# Altium PCB DXv2.pcbdoc (part 3 of 3)
Units mil, origin at the board's own origin, x right, y up, seen from the top; angles counter-clockwise.
Board outline 12846.15 x 9153.85 mil, 2 copper layers (TopLayer, BottomLayer); 114 components, 102 nets, 394 pads, 175 vias.
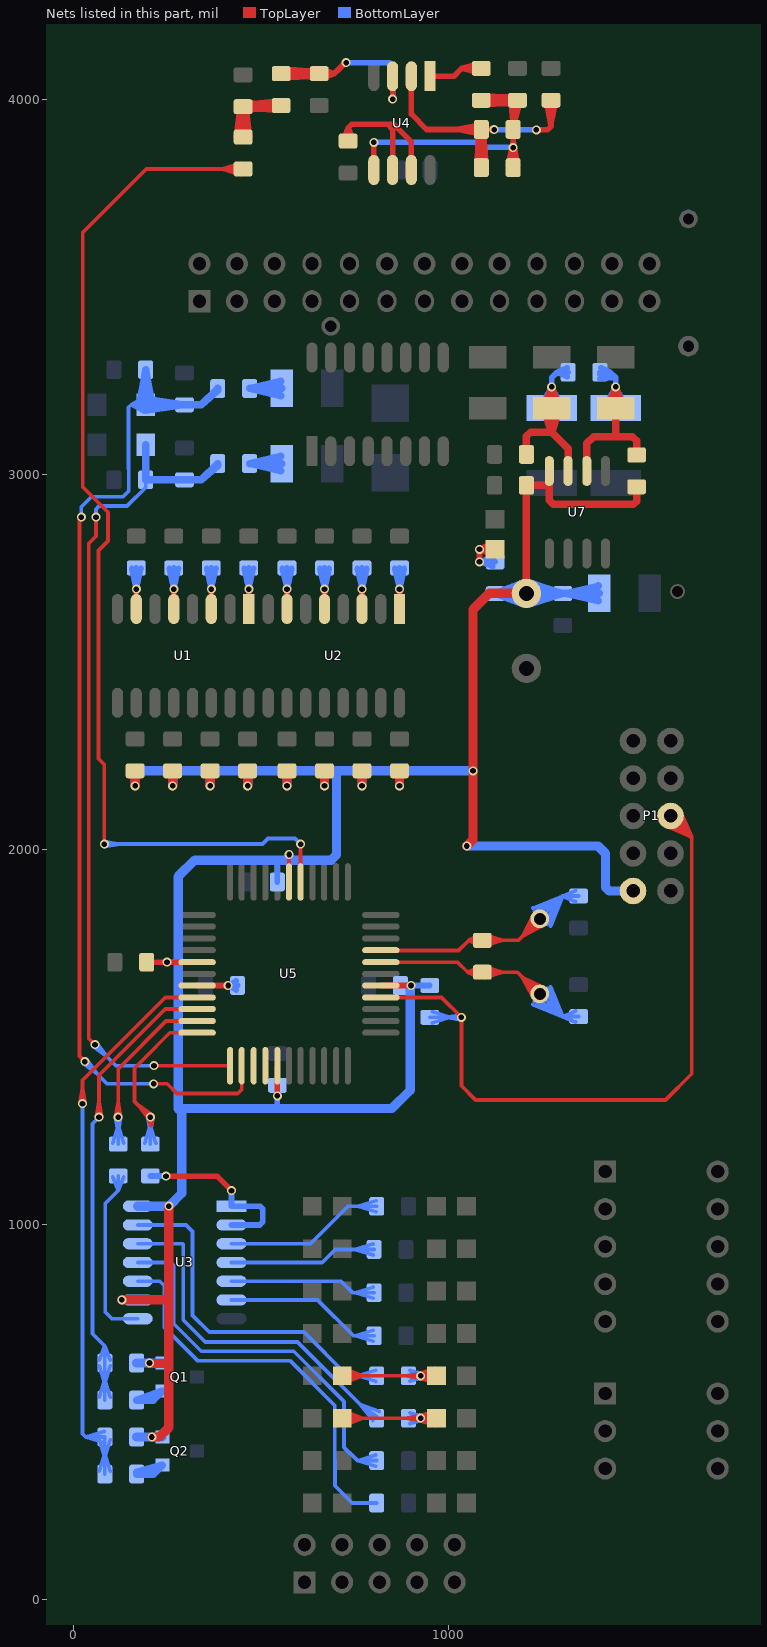
[diagram p3: the nets of this part, all layers, seen from the top]

## Via types
v1: diameter 24, hole 15, TopLayer to BottomLayer, tented both sides, 115 vias
v2: diameter 40, hole 25, TopLayer to BottomLayer, tented both sides, 60 vias

## Nets (pads, with @x,y where several pads share a name; then routed paths per layer and width w, separated by ;. In a path a pad name is that pad's centre, name@x,y a point inside that pad or via, vN(x,y) a via of type N, cw(c..) or ccw(c..) an arc to the next point about the centre after c; other vN are vias at no path point) (continued)
LED-007: D9.2 D17.2 R40.2 | length 1818
  TopLayer w10: D9.2@717.94,484.24 D17.2@969.2,484.24 ; D9.2@718.84,474.28 772.94,484.24 ; D9.2@718.84,494.2 772.94,484.24 ; D9.2@721.57,464.57 772.94,484.24 ; D9.2@721.57,503.91 772.94,484.24 ; v1@924.37,477.77 D17.2@965.56,464.57 ; v1@924.37,490.71 D17.2@965.56,503.91 ; v1@925.96,477.32 D17.2@968.29,474.28 ; v1@925.96,491.16 D17.2@968.29,494.2 ; v1@926.46,477.27 885.04,484.24 v1@926.46,491.22 ; v1@927.62,477.27 969.04,484.24 v1@927.62,491.22 ; v1@929.24,477.59 D17.2@968.29,494.2 ; v1@929.24,490.89 D17.2@968.29,474.28 ; v1@930.72,478.28 D17.2@965.56,503.91 ; v1@930.72,490.2 D17.2@965.56,464.57 ; 914.2,484.24 D17.2@965.56,464.57 ; 914.2,484.24 D17.2@965.56,503.91 ; 914.2,484.24 D17.2@968.29,474.28 ; 914.2,484.24 D17.2@968.29,494.2 ; 914.2,484.24 v1@925.13,477.51 ; 914.2,484.24 v1@925.13,490.98 ; 914.2,484.24 v1(927.04,484.24) ; 914.2,484.24 v1@925.13,477.51 ; 914.2,484.24 v1@925.13,490.98 ; 914.2,484.24 v1(927.04,484.24) ; 914.2,484.24 v1@925.13,477.51 ; 914.2,484.24 v1@925.13,490.98 ; 914.2,484.24 v1(927.04,484.24) ; 914.2,484.24 v1@925.13,477.51 ; 914.2,484.24 v1@925.13,490.98 ; 914.2,484.24 v1(927.04,484.24) ; v1(927.04,484.24) D17.2@965.56,503.91 ; v1(927.04,484.24) D17.2@968.29,494.2 ; v1(927.04,484.24) D17.2@965.56,464.57 ; v1(927.04,484.24) D17.2@968.29,474.28
  BottomLayer w10: v1@923.22,478.38 R40.2@898.24,498.83 ; v1@923.22,490.11 R40.2@898.24,469.65 ; v1@926.28,477.28 R40.2@894.76,484.24 ; v1@926.28,491.2 R40.2@894.76,484.24 ; v1@929.51,477.69 R40.2@898.24,469.65 ; v1@929.51,490.79 R40.2@898.24,498.83 ; R40.2@894.76,484.24 v1(927.04,484.24) ; R40.2@898.24,469.65 v1(927.04,484.24) ; R40.2@898.24,498.83 v1(927.04,484.24)
LED-008: D10.2 D18.2 R41.2 | length 1818
  TopLayer w10: D10.2@717.94,597.27 D18.2@969.2,597.27 ; D10.2@718.84,587.31 772.94,597.27 ; D10.2@718.84,607.23 772.94,597.27 ; D10.2@721.57,577.6 772.94,597.27 ; D10.2@721.57,616.93 772.94,597.27 ; v1@924.37,590.8 D18.2@965.56,577.6 ; v1@924.37,603.74 D18.2@965.56,616.93 ; v1@925.96,590.35 D18.2@968.29,587.31 ; v1@925.96,604.18 D18.2@968.29,607.23 ; v1@926.46,590.29 885.04,597.27 v1@926.46,604.24 ; v1@927.62,590.29 969.04,597.27 v1@927.62,604.24 ; v1@929.24,590.62 D18.2@968.29,607.23 ; v1@929.24,603.91 D18.2@968.29,587.31 ; v1@930.72,591.31 D18.2@965.56,616.93 ; v1@930.72,603.22 D18.2@965.56,577.6 ; 914.2,597.27 D18.2@965.56,577.6 ; 914.2,597.27 D18.2@965.56,616.93 ; 914.2,597.27 D18.2@968.29,587.31 ; 914.2,597.27 D18.2@968.29,607.23 ; 914.2,597.27 v1@925.13,590.53 ; 914.2,597.27 v1@925.13,604 ; 914.2,597.27 v1(927.04,597.27) ; 914.2,597.27 v1@925.13,590.53 ; 914.2,597.27 v1@925.13,604 ; 914.2,597.27 v1(927.04,597.27) ; 914.2,597.27 v1@925.13,590.53 ; 914.2,597.27 v1@925.13,604 ; 914.2,597.27 v1(927.04,597.27) ; 914.2,597.27 v1@925.13,590.53 ; 914.2,597.27 v1@925.13,604 ; 914.2,597.27 v1(927.04,597.27) ; v1(927.04,597.27) D18.2@965.56,577.6 ; v1(927.04,597.27) D18.2@965.56,616.93 ; v1(927.04,597.27) D18.2@968.29,587.31 ; v1(927.04,597.27) D18.2@968.29,607.23
  BottomLayer w10: v1@923.22,591.4 R41.2@898.24,611.86 ; v1@923.22,603.13 R41.2@898.24,582.68 ; v1@926.28,590.31 R41.2@894.76,597.27 ; v1@926.28,604.23 R41.2@894.76,597.27 ; v1@929.51,590.72 R41.2@898.24,582.68 ; v1@929.51,603.82 R41.2@898.24,611.86 ; R41.2@894.76,597.27 v1(927.04,597.27) ; R41.2@898.24,582.68 v1(927.04,597.27) ; R41.2@898.24,611.86 v1(927.04,597.27)
LED-164-1: R27.2 U5.33 | length 795.8
  TopLayer w10: 189,1442.63 163.99,1417.62 163.99,1329.03 v1(206.21,1286.82) 207.94,1263.87 ; 189,1443 258.18,1512.18 U5.33@330.85,1512.18 ; v1@199.39,1285.23 207.94,1263.87 ; v1@200.9,1282.25 172.99,1320.03 v1@210.78,1292.12 ; v1@207.94,1286.82 207.94,1263.87 ; v1@213.19,1286.27 207.94,1263.87
  BottomLayer w10: R27.2@191.38,1217.29 206.21,1265.04 R27.2@221.04,1217.29 ; v1@199.23,1286.23 206.21,1244.82 v1@213.18,1286.23 ; R27.2@206.21,1215.04 v1(206.21,1286.82)
LED-164-2: R28.2 U5.32 | length 772.1
  TopLayer w10: v1@113.53,1287.4 120.5,1328.82 ; v1(120.5,1286.82) 120.5,1328.82 ; v1@120.5,1288.55 120.5,1415.81 247.88,1543.18 U5.32@330.85,1543.18 ; v1@127.48,1287.4 120.5,1328.82
  BottomLayer w10: R28.2@105.67,1217.29 120.5,1265.04 R28.2@135.33,1217.29 ; v1@113.53,1286.23 120.5,1244.82 v1@127.48,1286.23 ; R28.2@120.5,1215.04 v1(120.5,1286.82)
LED-COM01: R33.2 R42.2 U5.31 | length 1725.6
  TopLayer w10: v1@62.45,1287.4 69.43,1328.82 v1@76.4,1287.4 ; v1(69.43,1286.82) 69.43,1398.57 246.04,1575.18 U5.31@330.85,1575.18
  BottomLayer w10: v1(69.43,1286.82) 52.11,1269.5 52.11,709.39 84.85,676.65 ; R42.2@70.02,540.03 84.85,587.78 ; R33.2@70.02,624.22 84.85,576.47 ; R33.2@70.11,639.28 84.85,676.65 ; R42.2@84.85,532.78 R33.2@84.85,631.47 84.85,676.65 ; R42.2@84.85,537.78 84.85,587.78 ; R33.2@84.85,626.47 84.85,576.47 ; R33.2@84.85,636.47 84.85,676.65 ; R33.2@99.59,639.28 84.85,676.65 ; R42.2@99.68,540.03 84.85,587.78 ; R33.2@99.68,624.22 84.85,576.47
LED-COM02: R45.2 R46.2 U5.30 | length 1985.4
  TopLayer w10: v1@18.3,1323.76 25.28,1365.17 v1@32.25,1323.76 ; v1(25.28,1323.17) 25.28,1385.28 246.18,1606.18 U5.30@330.85,1606.18
  BottomLayer w10: v1(25.28,1323.17) 25.28,442.75 33.93,434.09 R45.2@84.85,434.09 R46.2@84.85,335.4 ; R46.2@70.02,342.65 84.85,390.4 ; R45.2@70.02,426.84 84.85,379.09 ; R45.2@82.6,419.26 34.85,434.09 R45.2@82.6,448.92 ; R46.2@84.85,340.4 84.85,390.4 ; R45.2@84.85,429.09 84.85,379.09 ; R46.2@99.68,342.65 84.85,390.4 ; R45.2@99.68,426.84 84.85,379.09
MCU-PWM: R26.1 U5.16 | length 3044.3
  TopLayer w10: v1(83.59,2015.12) 83.59,2226.68 67.72,2242.55 67.72,2798.13 93.19,2823.6 93.19,2900.33 25.93,2967.6 25.93,3646.29 195.13,3815.5 R26.1@453.5,3815.5 ; R26.1@446.25,3800.67 398.5,3815.5 ; R26.1@446.25,3830.33 398.5,3815.5 ; R26.1@448.5,3815.5 398.5,3815.5 ; U5.16@606.85,1914.18 v1(606.85,2015.12)
  BottomLayer w10: v1(83.59,2015.12) 505.12,2015.12 520,2030 591.97,2030 v1(606.85,2015.12) ; v1@84.17,2008.15 125.59,2015.12 v1@84.17,2022.1
MCU_AI01: C16.1 D20.K R48.2 R50.2 U5.34 | length 2784.6
  TopLayer w10: v1(58.61,1480.3) 42.08,1496.83 42.08,2816.87 61.19,2835.99 v1(61.19,2887.07) ; v1(215.81,1424.18) U5.34@418.85,1424.18
  BottomLayer w10: v1@54.03,1475 91.78,1447.06 ; v1@61.19,2888.36 61.19,2908.27 69.49,2916.57 143.86,2916.57 193.73,2966.44 C16.1@193.73,2986.57 ; v1@63.92,1484.86 91.78,1447.06 ; v1(215.81,1424.18) 114.66,1424.18 58.61,1480.23 v1(58.61,1480.3) 91.78,1447.06
  BottomLayer w20: C16.1@193.73,2991.57 D20.K@193.73,3071.57 ; D20.K@193.73,3080.07 C16.1@193.73,2986.57 ; C16.1@212.24,2986.57 R50.2@292.24,2986.57 ; R50.2@273.73,2986.57 C16.1@193.73,2986.57 ; R50.2@302.24,2986.57 342.49,2986.57 ; R48.2@385.92,3025 342.49,2986.57 ; R48.2@385.92,3030 342.49,2986.57 ; C16.1@193.73,2986.57 R50.2@297.24,2986.57 342.49,2986.57
MCU_AI02: C17.1 D21.K R49.2 R51.2 U5.35 | length 4062.4
  TopLayer w10: v1(22.19,2887.07) 17.08,2881.96 17.08,1449.76 v1(31.66,1435.18) ; v1(215.22,1375.98) 251.23,1375.98 277.2,1350.01 439.08,1350.01 449.85,1360.78 U5.35@449.85,1424.18
  BottomLayer w10: v1(22.19,2887.07) 22.19,2914.31 49.45,2941.57 133.5,2941.57 148.73,2956.8 148.73,3016.34 148.21,3016.86 148.21,3179.81 155.07,3186.67 ; v1@27.09,1429.87 64.87,1401.96 v1@36.97,1439.74 ; v1(31.66,1435.18) 90.85,1375.98 v1(215.22,1375.98) ; D21.K@188.56,3167.35 155.07,3186.67 ; D21.K@188.56,3205.99 155.07,3186.67 ; D21.K@192.44,3176.76 155.07,3186.67 ; D21.K@192.44,3196.59 155.07,3186.67 ; D21.K@193.73,3186.67 155.07,3186.67
  BottomLayer w20: D21.K@178.79,3193 C17.1@193.73,3276.67 ; D21.K@179.33,3196.03 C17.1@193.73,3275.18 ; D21.K@193.73,3191.67 C17.1@193.73,3276.67 ; C17.1@193.73,3280.18 D21.K@193.73,3186.67 342.49,3186.67 ; D21.K@195.06,3171.73 278.73,3186.67 D21.K@195.06,3201.62 ; D21.K@208.13,3196.03 C17.1@193.73,3275.18 ; D21.K@208.67,3193 C17.1@193.73,3276.67 ; D21.K@212.24,3186.67 R51.2@292.24,3186.67 ; D21.K@212.33,3174.82 R51.2@292.24,3186.67 ; D21.K@212.33,3198.53 R51.2@292.24,3186.67 ; R51.2@302.24,3186.67 342.49,3186.67 ; R49.2@385.93,3225.11 342.49,3186.67 ; R49.2@385.93,3230.11 342.49,3186.67 ; C17.1@193.73,3275.18 193.73,3195.18 C17.1@193.73,3275.18
MCU_AI03: U5.37
MCU_AI04: U5.36
NetC3_1: C3.1 R26.2 R29.1 | length 2056.1
  TopLayer w15: R26.2@436,3900.82 C3.1@443.92,3965.65 ; R26.2@441.06,3901.7 453.5,3965.5 R26.2@465.94,3901.7 ; C3.1@441.06,3980.3 453.5,3916.5 C3.1@465.94,3980.3 ; R26.2@446.17,3902.57 C3.1@463.08,3965.65 ; R26.2@448.5,3900.5 C3.1@443.92,3965.65 ; R26.2@453.5,3900.5 C3.1@453.5,3981.5 ; C3.1@453.5,3984.65 R29.1@555,3984.65 ; R26.2@458.5,3900.5 C3.1@463.08,3965.65 ; C3.1@458.5,3981.5 523.61,3984.65 ; C3.1@459.1,3993.99 523.61,3984.65 ; C3.1@460.3,3969.13 523.61,3984.65 ; R26.2@460.83,3902.57 C3.1@443.92,3965.65 ; R26.2@471,3900.82 C3.1@463.08,3965.65 ; R29.1@547.75,3972.35 484.45,3990.32 ; R29.1@548.44,3997.05 484.93,3982.78 ; R29.1@548.8,3972.21 485,3984.65 ; R29.1@548.8,3997.09 485,3984.65 ; R29.1@549.16,3972.18 484.93,3982.78 ; R29.1@549.89,3997.15 484.45,3990.32 ; R29.1@550.66,3972.17 483.72,3974.87 ; 483.72,3974.87 R29.1@547.03,3996.79 ; 483.72,3974.87 R29.1@550,3984.65 ; 484.45,3990.32 R29.1@550,3984.65 ; 484.93,3982.78 R29.1@550,3984.65 ; 485,3984.65 R29.1@550,3984.65 ; 523.61,3984.65 R29.1@547.04,3972.51 ; 523.61,3984.65 R29.1@547.04,3996.79 ; 523.61,3984.65 R29.1@550,3984.65 ; 523.61,3984.65 R29.1@547.04,3972.51 ; 523.61,3984.65 R29.1@547.04,3996.79 ; 523.61,3984.65 R29.1@550,3984.65 ; 523.61,3984.65 R29.1@547.04,3972.51 ; 523.61,3984.65 R29.1@547.04,3996.79 ; 523.61,3984.65 R29.1@550,3984.65
NetC6_1: C6.1 R29.2 U4.3 | length 2043.5
  TopLayer w15: R29.2@555,4066.65 681.75,4066.65 ; R29.2@559.54,4057.16 624.73,4061.01 ; R29.2@559.78,4082.15 629.48,4077.11 ; R29.2@560.62,4057.17 625.12,4066.65 ; R29.2@560.85,4057.18 C6.1@651.5,4069.65 ; R29.2@560.85,4082.12 C6.1@651.5,4069.65 ; R29.2@561.77,4082.02 625.12,4066.65 ; R29.2@562.44,4057.39 629.48,4077.11 ; R29.2@562.83,4081.82 624.73,4061.01 ; C6.1@649.73,4082.02 586.4,4066.65 ; C6.1@650.88,4057.17 586.4,4066.65 ; C6.1@656.5,4069.65 696.44,4069.65 ; C6.1@663.53,4057.32 681.75,4066.65 ; C6.1@663.74,4057.35 696.44,4069.65 ; C6.1@663.74,4081.95 696.44,4069.65 ; C6.1@667.02,4080.86 681.75,4066.65 ; U4.3@852.18,4037.76 v1(852.18,4001.85) U4.3@852.18,4062.76 ; R29.2@560,4069.65 625.12,4066.65 ; R29.2@560,4069.65 624.73,4061.01 ; R29.2@560,4069.65 586.4,4066.65 ; R29.2@560,4069.65 629.48,4077.11 ; R29.2@560,4069.65 586.4,4066.65 ; R29.2@560,4069.65 C6.1@651.5,4069.65 ; R29.2@560,4069.65 586.4,4066.65 ; R29.2@561.55,4057.25 586.4,4066.65 ; R29.2@561.55,4057.25 586.4,4066.65 ; R29.2@561.55,4057.25 586.4,4066.65 ; R29.2@564.29,4081.39 586.4,4066.65 ; R29.2@564.29,4081.39 586.4,4066.65 ; R29.2@564.29,4081.39 586.4,4066.65 ; 586.4,4066.65 C6.1@651.5,4069.65 ; 681.75,4066.65 661.5,4069.65 696.44,4069.65 ; 696.44,4069.65 725.83,4099.04 v1(728.42,4099.04) 696.44,4069.65
  BottomLayer w15: v1(728.42,4099.04) 843.75,4099.04 852.18,4090.62 v1(852.18,4001.85)
NetC7_1: C7.1 R30.2 R32.1 U4.2 | length 2267.3
  TopLayer w15: 902.18,3977.76 U4.2@902.18,4037.76 ; U4.2@902.18,4062.76 902.18,3961.57 942.89,3920.86 C7.1@1088.67,3920.86 ; R32.1@1076.17,3823.87 1081.02,3890.09 ; C7.1@1076.22,3914.66 1088.67,3850.86 ; R32.1@1076.44,3826.74 1096.32,3890.09 ; C7.1@1087.47,3908.42 1023.67,3920.86 C7.1@1087.47,3933.3 ; R32.1@1088.67,3819.14 C7.1@1088.67,3920.86 ; C7.1@1088.67,3915.86 1088.67,3850.86 ; R32.1@1100.89,3826.74 1081.02,3890.09 ; C7.1@1101.11,3914.66 1088.67,3850.86 ; R32.1@1101.16,3823.87 1096.32,3890.09 ; v1(1123.01,3920.54) 1122.68,3920.86 C7.1@1088.67,3920.86 ; v1(1235.42,3919.57) 1265.23,3919.57 1274.54,3928.88 R30.2@1274.54,3998.69 ; R30.2@1262.1,3997.49 1274.54,3933.69 R30.2@1286.98,3997.49 ; R32.1@1076.51,3827.06 1088.67,3850.86 ; R32.1@1076.51,3827.06 1088.67,3850.86 ; R32.1@1076.51,3827.06 1088.67,3850.86 ; 1081.02,3890.09 R32.1@1088.67,3824.14 ; R32.1@1088.67,3824.14 1088.67,3889.14 ; R32.1@1088.67,3824.14 1096.32,3890.09 ; R32.1@1088.67,3824.14 1088.67,3850.86 ; R32.1@1088.67,3824.14 1088.67,3850.86 ; R32.1@1088.67,3824.14 1088.67,3889.14 ; R32.1@1088.67,3824.14 1088.67,3850.86 ; 1088.67,3850.86 R32.1@1100.82,3827.06 ; 1088.67,3850.86 R32.1@1100.82,3827.06 ; 1088.67,3850.86 R32.1@1100.82,3827.06 ; 1088.67,3889.14 1076.22,3825.34 1088.67,3889.14 ; 1088.67,3889.14 1101.11,3825.34 1088.67,3889.14
  BottomLayer w15: v1(1123.01,3920.54) 1234.45,3920.54 v1(1235.42,3919.57) 1178.39,3920.54
NetC7_2: C7.2 C9.1 R32.2 R43.2 U4.5 | length 2817.6
  TopLayer w15: U4.5@802.18,3812.76 v1(802.18,3886.63) ; U4.5@802.18,3829.63 v1(802.18,3886.63) ; R43.2@1088.67,3998.69 C9.1@1185.21,3998.69 1173.67,3987.15 C7.2@1173.67,3920.86 ; R43.2@1093.23,3986.2 1159.05,3990.14 ; R43.2@1093.23,4011.18 1159.05,4007.24 ; R43.2@1096.46,3986.51 1159.05,4007.24 ; R43.2@1096.46,4010.88 1159.05,3990.14 ; C9.1@1167.71,3998.75 C7.2@1173.67,3930.11 ; C9.1@1179.01,3986.25 1115.21,3998.69 ; C9.1@1179.01,4011.13 1115.21,3998.69 ; C9.1@1192.49,3996.38 C7.2@1173.67,3930.11 ; v1(802.18,3886.63) 802.18,3837.76 v1(802.18,3886.63) ; R43.2@1093.67,3998.69 1158.67,3998.69 ; R43.2@1093.67,3998.69 1159.05,4007.24 ; R43.2@1093.67,3998.69 1115.21,3998.69 ; R43.2@1093.67,3998.69 1158.67,3998.69 ; R43.2@1093.67,3998.69 1115.21,3998.69 ; R43.2@1093.67,3998.69 1159.05,3990.14 ; R43.2@1093.67,3998.69 1115.21,3998.69 ; R43.2@1097.29,3986.73 1115.21,3998.69 ; R43.2@1097.29,3986.73 1115.21,3998.69 ; R43.2@1097.29,3986.73 1115.21,3998.69 ; R43.2@1097.29,4010.65 1115.21,3998.69 ; R43.2@1097.29,4010.65 1115.21,3998.69 ; R43.2@1097.29,4010.65 1115.21,3998.69 ; 1115.21,3998.69 1180.21,3998.69 C7.2@1173.67,3930.11 ; 1158.67,3998.69 1094.87,4011.13 1158.67,3998.69 ; 1158.67,3998.69 1094.87,3986.25 1158.67,3998.69 ; v1(1173.54,3872.27) C7.2@1173.67,3920.86 ; v1(1173.54,3872.27) R32.2@1173.67,3819.14 C7.2@1173.67,3920.86 ; v1(1173.54,3872.27) 1173.67,3889.14 ; v1(1173.54,3872.27) 1161.22,3825.34 1173.67,3889.14 ; v1(1173.54,3872.27) 1186.11,3825.34 1173.67,3889.14 ; v1(1173.54,3872.27) 1173.67,3889.14 ; v1(1173.54,3872.27) 1173.67,3889.14 ; v1(1173.54,3872.27) 1173.67,3824.14 1173.67,3889.14
  BottomLayer w15: v1(802.18,3886.63) 1078.17,3886.63 1091.9,3872.91 1172.91,3872.91 v1(1173.54,3872.27) 1116.53,3872.91
NetC14_1: C14.1 U5.29 | length 182.9
  TopLayer w15: U5.29@330.85,1638.18 v1(413.71,1638.18)
  BottomLayer w15: C14.1@435.58,1626.08 v1(413.71,1638.18) ; C14.1@435.58,1650.28 v1(413.71,1638.18) ; v1(413.71,1638.18) C14.1@438.71,1638.18 v1(413.71,1638.18)
NetD1_1: D1.1 R9.1 | length 586.1
  TopLayer w15: v1(1083.92,2767.91) v1(1083.92,2801.3) ; v1(1083.92,2801.3) v1@1084.06,2801.45 ; v1(1083.92,2801.3) D1.1@1125.59,2801.45 v1@1084.06,2801.45 ; v1(1083.92,2801.3) 1121.9,2818.55 v1@1084.06,2801.45 ; v1(1083.92,2801.3) 1121.9,2784.34 v1@1084.06,2801.45
  BottomLayer w15: v1(1083.92,2767.91) v1@1084.06,2767.77 ; v1(1083.92,2767.91) R9.1@1125.59,2767.77 v1@1084.06,2767.77 ; v1(1083.92,2767.91) 1118.45,2755.45 v1@1084.06,2767.77 ; v1(1083.92,2767.91) 1118.45,2780.08 v1@1084.06,2767.77 ; v1(1083.92,2767.91) 1120.59,2767.77 v1@1084.06,2767.77
NetD19_K: D19.K F3.2 R52.1 R53.2 U7.7 | length 1122.1
  TopLayer w15: F3.2@1254.35,3182.21 v1(1276.41,3234.47) ; F3.2@1276.41,3177.75 v1(1276.41,3234.47) ; F3.2@1298.46,3182.21 v1(1276.41,3234.47)
  TopLayer w20: R53.2@1209.15,3054.4 1209.15,3102.29 ; R53.2@1209.15,3059.4 1209.15,3102.29 ; F3.2@1256.65,3174.65 1276.41,3113.07 ; F3.2@1276.41,3177.75 1276.41,3113.07 ; F3.2@1296.17,3174.65 1276.41,3113.07 ; U7.7@1320.06,3010.06 1320.06,3069.42 ; U7.7@1320.06,3038.06 1320.06,3069.42 ; 1209.15,3102.29 1219.93,3113.07 1276.41,3113.07 ; 1276.41,3113.07 1320.06,3069.42
  BottomLayer w15: D19.K@1249.73,3184.41 v1(1276.41,3234.47) ; D19.K@1263.98,3179.12 v1(1276.41,3234.47) ; D19.K@1276.41,3177.75 v1(1276.41,3234.47) ; D19.K@1288.83,3179.12 v1(1276.41,3234.47) ; D19.K@1303.09,3184.41 v1(1276.41,3234.47) ; R52.1@1317.5,3261.18 1291.15,3273.39 ; R52.1@1317.5,3285.59 1291.15,3273.39 ; R52.1@1318.33,3273.39 1291.15,3273.39 ; R52.1@1320.19,3273.39 1291.15,3273.39 ; v1(1276.41,3234.47) 1276.41,3258.65 1291.15,3273.39
NetD22_K: D22.K F4.2 R47.2 R52.2 U7.6 | length 1161.2
  TopLayer w15: F4.2@1425.07,3182.21 v1(1447.12,3234.47) ; F4.2@1447.12,3177.75 v1(1447.12,3234.47) ; F4.2@1469.17,3182.21 v1(1447.12,3234.47)
  TopLayer w20: U7.6@1370.06,3010.06 1370.06,3083.91 1388.09,3101.94 1446.76,3101.94 ; F4.2@1447.12,3177.75 1447.12,3102.3 1446.76,3101.94 ; R47.2@1503.03,3052.95 1503.03,3090.09 1491.18,3101.94 1446.76,3101.94 ; U7.6@1370.06,3038.06 1370.06,3056.99 U7.6@1370.06,3038.06
  BottomLayer w15: R52.2@1404.16,3255.93 1447.12,3258.65 ; R52.2@1405.19,3268.39 1447.12,3258.65 ; R52.2@1409.76,3280.02 1447.12,3258.65 ; D22.K@1420.44,3184.41 v1(1447.12,3234.47) ; D22.K@1434.7,3179.12 v1(1447.12,3234.47) ; D22.K@1447.12,3177.75 v1(1447.12,3234.47) ; D22.K@1459.54,3179.12 v1(1447.12,3234.47) ; D22.K@1473.8,3184.41 v1(1447.12,3234.47) ; 1432.38,3273.39 1447.12,3258.65 ; 1432.38,3273.39 R52.2@1405.19,3273.39 1432.38,3273.39 ; 1432.38,3273.39 1408.07,3285.55 1432.38,3273.39 ; 1432.38,3273.39 1408.07,3261.22 1432.38,3273.39 ; v1(1447.12,3234.47) 1447.12,3258.65
NetF5_1: F5.1 R48.1 | length 257.9
  BottomLayer w20: F5.1@554.56,3010.14 R48.1@470.93,3030 ; F5.1@554.56,3049.86 R48.1@470.93,3030 ; F5.1@556.89,3030 R48.1@470.93,3030
NetF6_1: F6.1 R49.1 | length 343.9
  BottomLayer w20: F6.1@554.56,3210.24 R49.1@470.93,3230.11 ; F6.1@554.56,3249.97 R49.1@470.93,3230.11 ; R49.1@470.93,3230.11 F6.1@556.89,3230.11 R49.1@470.93,3230.11
NetQ1_2: Q1.2 R42.1 | length 215.6
  BottomLayer w20: Q1.2@238.04,556.67 214.15,532.78 ; 214.15,532.78 R42.1@169.85,532.78 Q1.2@237.05,556.67 ; 214.15,532.78 Q1.2@237.05,556.67 ; 214.15,532.78 Q1.2@237.05,556.67
NetQ2_2: Q2.2 R46.1 | length 285.4
  BottomLayer w20: R46.1@169.85,340.4 Q2.2@237.05,359.29 ; Q2.2@238.04,359.29 214.15,335.4 ; 214.15,335.4 R46.1@169.85,335.4 Q2.2@237.05,359.29 ; 214.15,335.4 Q2.2@237.05,359.29 ; 214.15,335.4 Q2.2@237.05,359.29
NetR10_2: R10.2 U1.1 | length 335.4
  TopLayer w15: U1.1@468.74,2641.99 v1(468.74,2694.91)
  BottomLayer w15: R10.2@481.17,2750.02 v1(468.74,2694.91) ; v1(468.74,2694.91) R10.2@468.74,2751.41 v1(468.74,2694.91) ; v1(468.74,2694.91) 456.32,2750.02 v1(468.74,2694.91)
NetR12_2: R12.2 U1.3 | length 335.4
  TopLayer w15: U1.3@368.75,2641.99 v1(368.74,2694.91)
  BottomLayer w15: R12.2@381.17,2750.02 v1(368.74,2694.91) ; v1(368.74,2694.91) R12.2@368.74,2751.41 v1(368.74,2694.91) ; v1(368.74,2694.91) 356.32,2750.02 v1(368.74,2694.91)
NetR14_2: R14.2 U1.5 | length 335.4
  TopLayer w15: U1.5@268.75,2641.99 v1(268.75,2694.91)
  BottomLayer w15: R14.2@281.17,2750.02 v1(268.75,2694.91) ; v1(268.75,2694.91) R14.2@268.75,2751.41 v1(268.75,2694.91) ; v1(268.75,2694.91) 256.32,2750.02 v1(268.75,2694.91)
NetR16_2: R16.2 U1.7 | length 335.4
  TopLayer w15: U1.7@168.75,2641.99 v1(168.75,2694.91)
  BottomLayer w15: R16.2@181.17,2750.02 v1(168.75,2694.91) ; v1(168.75,2694.91) R16.2@168.75,2751.41 v1(168.75,2694.91) ; v1(168.75,2694.91) 156.32,2750.02 v1(168.75,2694.91)
NetR18_2: R18.2 U2.1 | length 335.4
  TopLayer w15: U2.1@870.69,2641.99 v1(870.69,2694.91)
  BottomLayer w15: R18.2@883.11,2750.02 v1(870.69,2694.91) ; v1(870.69,2694.91) R18.2@870.69,2751.41 v1(870.69,2694.91) ; v1(870.69,2694.91) 858.26,2750.02 v1(870.69,2694.91)
NetR20_2: R20.2 U2.3 | length 335.4
  TopLayer w15: U2.3@770.69,2641.99 v1(770.69,2694.91)
  BottomLayer w15: R20.2@783.11,2750.02 v1(770.69,2694.91) ; v1(770.69,2694.91) R20.2@770.69,2751.41 v1(770.69,2694.91) ; v1(770.69,2694.91) 758.26,2750.02 v1(770.69,2694.91)
NetR22_2: R22.2 U2.5 | length 335.4
  TopLayer w15: U2.5@670.69,2641.98 v1(670.69,2694.91)
  BottomLayer w15: R22.2@683.11,2750.02 v1(670.69,2694.91) ; v1(670.69,2694.91) R22.2@670.69,2751.41 v1(670.69,2694.91) ; v1(670.69,2694.91) 658.26,2750.02 v1(670.69,2694.91)
NetR24_2: R24.2 U2.7 | length 335.4
  TopLayer w15: U2.7@570.69,2641.99 v1(570.69,2694.91)
  BottomLayer w15: R24.2@583.11,2750.02 v1(570.69,2694.91) ; v1(570.69,2694.91) R24.2@570.69,2751.41 v1(570.69,2694.91) ; v1(570.69,2694.91) 558.26,2750.02 v1(570.69,2694.91)
NetR27_1: R27.1 U3.1 U3.2 | length 625.3
  TopLayer w15: v1(247.88,1129.9) 384.16,1129.9 v1(422.78,1091.28)
  BottomLayer w15: R27.1@206.21,1130.04 247.74,1130.04 v1(247.88,1129.9) ; U3.2@422.64,999.61 497.9,999.61 ; U3.2@447.64,999.61 497.9,999.61 ; U3.1@447.64,1049.61 498.95,1049.61 ; U3.1@422.64,1049.61 422.64,1091.14 v1(422.78,1091.28) U3.1@422.64,1049.61 ; U3.1@422.64,1049.61 498.95,1049.61 ; 497.9,999.61 505.77,1007.48 505.77,1042.79 498.95,1049.61
NetR28_1: R28.1 U3.8 | length 587.7
  BottomLayer w10: R28.1@105.79,1127.15 120.5,1091.18 ; R28.1@135.22,1127.15 120.5,1091.18 ; U3.8@172.64,749.61 103.65,749.61 85.88,767.39 85.88,1056.56 120.5,1091.18 ; 120.5,1091.18 R28.1@120.5,1130.04 120.5,1091.18
NetR34_1: R34.1 U3.3 | length 571.6
  BottomLayer w10: U3.3@422.64,949.61 633.52,949.61 733.29,1049.38 R34.1@802.94,1049.38 ; R34.1@807.61,1034.55 759.86,1049.38 ; R34.1@807.61,1064.21 759.86,1049.38 ; R34.1@809.86,1049.38 759.86,1049.38
NetR35_1: R35.1 U3.4 | length 544.6
  BottomLayer w10: U3.4@422.63,899.61 664.8,899.61 699.44,934.25 R35.1@802.84,934.25 752.84,934.25 ; R35.1@800.59,919.42 752.84,934.25 ; R35.1@800.59,949.08 752.84,934.25
NetR36_1: R36.1 U3.5 | length 542.8
  BottomLayer w10: U3.5@422.64,849.61 714.4,849.61 744.89,819.13 R36.1@802.84,819.13 752.84,819.13 ; R36.1@800.59,804.3 752.84,819.13 ; R36.1@800.59,833.96 752.84,819.13
NetR37_1: R37.1 U3.6 | length 569.8
  BottomLayer w10: U3.6@422.64,799.61 652.29,799.61 747.9,704 R37.1@802.84,704 752.84,704 ; R37.1@800.59,689.17 752.84,704 ; R37.1@800.59,718.83 752.84,704
NetR38_1: R38.1 U3.10 | length 1072.4
  BottomLayer w10: U3.10@172.64,849.61 231.34,849.61 243.74,837.21 243.74,725.79 270.3,699.23 331.78,637.75 578.25,637.75 697.93,518.07 697.93,371.77 698.5,371.2 698.5,304.1 744.41,258.19 R38.1@809.76,258.19
NetR39_1: R39.1 U3.11 | length 1118.6
  BottomLayer w10: U3.11@172.64,899.61 260.98,899.61 268.74,891.85 268.74,736.14 342.14,662.75 567.9,662.75 588.61,662.75 722.93,528.42 722.93,406.5 758.21,371.21 R39.1@809.76,371.21 ; R39.1@807.51,356.38 759.76,371.21 R39.1@807.51,386.04
NetR40_1: R40.1 U3.12 | length 1114.3
  BottomLayer w10: U3.12@172.64,949.61 292.36,949.61 293.74,948.23 293.74,746.5 352.49,687.75 557.54,687.75 598.96,687.75 802.47,484.24 R40.1@809.76,484.24 ; R40.1@799.38,478.41 764.91,521.8 ; R40.1@809.76,489.24 764.91,521.8 ; R40.1@816.84,502.46 764.91,521.8
NetR41_1: R41.1 U3.13 | length 1084.8
  BottomLayer w10: U3.13@172.64,999.61 301.23,999.61 318.74,982.1 318.74,758.38 363.3,713.82 615.58,713.82 732.14,597.27 R41.1@809.76,597.27 759.76,597.27 ; R41.1@807.51,582.44 759.76,597.27 ; R41.1@807.51,612.1 759.76,597.27
NetR43_1: R43.1 U4.1 | length 287
  TopLayer w15: U4.1@952.18,4062.76 1015.45,4062.76 1036.39,4083.69 ; R43.1@1082.01,4071.3 1036.39,4083.69 ; R43.1@1082.01,4096.08 1036.39,4083.69 ; R43.1@1083.67,4083.69 1036.39,4083.69 ; R43.1@1088.67,4083.69 1036.39,4083.69
NetR54_2: R54.2 U4.6 U4.7 | length 611
  TopLayer w15: R54.2@721.3,3892.08 733.6,3925.06 ; R54.2@733.6,3889.86 733.6,3925.06 ; R54.2@745.9,3892.08 733.6,3925.06 ; U4.6@852.18,3812.76 852.18,3921.19 838.25,3935.12 ; U4.6@852.18,3837.76 852.18,3897.76 ; U4.7@902.18,3812.76 902.18,3887.71 ; U4.7@902.18,3837.76 902.18,3887.71 ; 733.6,3925.06 743.65,3935.12 838.25,3935.12 ; 838.25,3935.12 854.77,3935.12 902.18,3887.71
OSC_N: C5.1 R31.1 U5.7 Y1.2 | length 1790.2
  TopLayer w10: U5.7@820.85,1700.18 1025.65,1700.18 1052.35,1673.48 ; R31.1@1083.2,1658.85 1052.35,1673.48 ; R31.1@1083.2,1688.12 1052.35,1673.48 ; R31.1@1086.49,1673.48 1052.35,1673.48 ; R31.1@1096.49,1673.48 1146.49,1673.48 ; R31.1@1098.74,1658.65 1146.49,1673.48 ; R31.1@1098.74,1688.31 1146.49,1673.48 ; Y1.2@1228.84,1603.74 1197.81,1660.54 ; Y1.2@1237.26,1609.24 1197.81,1660.54 ; Y1.2@1251.01,1623.69 1197.81,1660.54 ; Y1.2@1256.08,1632.38 1197.81,1660.54 ; 1052.35,1673.48 R31.1@1091.49,1673.48 1184.87,1673.48 1242.42,1615.93 Y1.2@1244.7,1615.93 1197.81,1660.54
  BottomLayer w10: Y1.2@1225.76,1587.25 1305.28,1555.35 ; Y1.2@1230.09,1596.42 1305.28,1555.35 ; Y1.2@1235.42,1604.95 1305.28,1555.35 ; Y1.2@1244.7,1615.93 1305.43,1555.19 ; Y1.2@1255.67,1625.2 1305.28,1555.35 ; Y1.2@1264.2,1630.54 1305.28,1555.35 ; Y1.2@1273.38,1634.86 1305.28,1555.35 ; C5.1@1340.08,1540.49 1305.43,1555.19 ; C5.1@1340.08,1569.89 1305.43,1555.19 ; C5.1@1343.07,1555.19 1305.43,1555.19 ; C5.1@1348.07,1555.19 1305.43,1555.19
OSC_P: C4.1 R31.2 U5.8 Y1.1 | length 1721
  TopLayer w10: U5.8@820.85,1732.18 821.85,1731.18 1027.97,1731.18 1055.27,1758.48 ; R31.2@1082.89,1743.92 1055.27,1758.48 ; R31.2@1082.89,1773.04 1055.27,1758.48 ; R31.2@1086.49,1758.48 1055.27,1758.48 ; R31.2@1096.49,1758.48 1146.49,1758.48 ; R31.2@1098.74,1743.65 1146.49,1758.48 ; R31.2@1098.74,1773.31 1146.49,1758.48 ; Y1.1@1228.56,1827.74 1198.48,1769.72 ; Y1.1@1237.11,1822.44 1198.48,1769.72 ; Y1.1@1244.7,1815.93 1187.25,1758.48 R31.2@1091.49,1758.48 1055.27,1758.48 ; Y1.1@1244.7,1817.71 Y1.1@1245.7,1817.71 ; Y1.1@1251.21,1808.34 1198.48,1769.72 ; Y1.1@1256.51,1799.79 1198.48,1769.72
  BottomLayer w10: Y1.1@1225.76,1844.61 1305.28,1876.51 ; Y1.1@1230.09,1835.44 1305.28,1876.51 ; Y1.1@1235.42,1826.91 1305.28,1876.51 ; Y1.1@1244.7,1815.93 1305.43,1876.67 ; Y1.1@1255.67,1806.66 1305.28,1876.51 ; Y1.1@1264.2,1801.32 1305.28,1876.51 ; Y1.1@1273.38,1797 1305.28,1876.51 ; C4.1@1340.08,1861.97 1305.43,1876.67 ; C4.1@1340.08,1891.37 1305.43,1876.67 ; C4.1@1343.07,1876.67 1305.43,1876.67 ; C4.1@1348.07,1876.67 1305.43,1876.67
RESET: P1.5 R44.1 U5.4 | length 2588.9
  TopLayer w10: U5.4@820.85,1606.18 982.62,1606.18 v1(1035.62,1553.18) 1035.62,1370.72 1073.65,1332.7 1579.54,1332.7 1649.74,1402.89 1649.74,2033.74 ; P1.5@1576.31,2064.92 1649.74,2033.74 ; P1.5@1580.85,2073.97 1649.74,2033.74 ; P1.5@1586.45,2082.3 1649.74,2033.74 ; P1.5@1593.33,2090.15 1649.74,2033.74 ; P1.5@1601.17,2097.03 1649.74,2033.74 ; P1.5@1609.51,2102.63 1649.74,2033.74 ; P1.5@1618.56,2107.17 1649.74,2033.74
  BottomLayer w10: R44.1@951.49,1553.18 v1(1035.62,1553.18) v1@1038.04,1550.76 ; R44.1@956.49,1553.18 1006.49,1553.18 ; R44.1@958.74,1538.35 1006.49,1553.18 ; R44.1@958.74,1568.01 1006.49,1553.18 ; v1@1035.04,1546.2 993.62,1553.18 v1@1035.04,1560.16
VCC: C1.1 C2.1 C10.2 C11.1 C12.1 C13.1 C15.1 F1.2 P1.2 Q1.3 Q2.3 R1.2 R2.2 R3.2 R4.2 R5.2 R6.2 R7.2 R8.2 R9.2 R33.1 R44.2 R45.1 R47.1 U3.9 U3.14 U5.5 U5.17 U5.27 U5.38 U7.8 | length 9468.8
  TopLayer w10: U5.17@575.85,1914.18 v1@575.85,1986.95
  TopLayer w15: C11.1@196.46,1700.18 v1(250.56,1700.18) U5.27@330.85,1700.18 ; v1(544.85,1343.89) U5.38@544.85,1424.18 ; U5.5@820.85,1638.18 v1(901.13,1638.18)
  TopLayer w20: C2.1@1209.15,2683.61 C10.2@1209.15,2971.84 1264.51,2971.84 1270.06,2966.29 1270.06,2982.06 1270.06,2931.76 1280.55,2921.27 1494.38,2921.27 1503.03,2929.92 R47.1@1503.03,2967.95 ; 1209.15,2886.84 C10.2@1209.15,2966.84
  TopLayer w25: v1(130,800) 255.69,800 ; v1(165.52,2170.69) R4.2@165.52,2210.59 ; v1(203.94,631.47) 205.42,630 255.69,630 ; v1(210,434.09) 230,434.09 255.69,459.78 255.69,630 ; v1(255.69,1049.61) 255.69,800 ; v1(265.52,2170.69) R3.2@265.52,2210.59 ; v1(365.52,2170.69) R2.2@365.52,2210.59 ; v1(465.52,2170.69) R1.2@465.52,2210.59 ; v1(570.69,2170.69) R8.2@570.69,2210.59 ; v1(670.69,2170.69) R7.2@670.69,2210.59 ; v1(770.69,2170.69) R6.2@770.69,2210.59 ; v1(870.69,2170.69) R5.2@870.69,2210.59 ; v1(1050,2010) 1066.72,2026.72 v1(1066.72,2210.35) 1066.72,2640.78 1109.55,2683.61 C2.1@1209.15,2683.61 ; 255.69,630 255.69,800
  BottomLayer w10: v1@576.06,1987.16 v1(576.37,1987.46)
  BottomLayer w15: v1(250.56,1700.18) 278.7,1700.18 ; 542.38,1310 544.85,1312.47 v1(544.85,1343.89) ; 543.67,1972.55 544.85,1971.38 C15.1@544.85,1914.18 ; v1(901.13,1638.18) R44.2@951.49,1638.18
  BottomLayer w20: C2.1@1213.6,2654.58 C1.1@1306.09,2683.61 ; C2.1@1213.6,2712.64 C1.1@1306.09,2683.61 ; C2.1@1221.09,2683.61 C1.1@1301.09,2683.61 ; C2.1@1223.84,2657.79 C1.1@1301.09,2683.61 ; C2.1@1223.84,2709.43 C1.1@1301.09,2683.61 ; C1.1@1311.09,2683.61 F1.2@1391.09,2683.61 ; R9.2@1126.43,2683.61 C2.1@1209.15,2683.61 ; R9.2@1126.43,2683.61 1203.94,2654.71 R9.2@1130.59,2682.77 ; R9.2@1126.43,2683.61 1203.94,2712.51 R9.2@1130.59,2682.77 ; R9.2@1130.59,2682.77 C2.1@1209.15,2683.61 ; C2.1@1209.15,2683.61 C1.1@1306.09,2683.61 ; C1.1@1306.09,2683.61 F1.2@1403.03,2683.61 C1.1@1313.03,2683.61 ; C1.1@1313.03,2683.61 1400.8,2663.73 C1.1@1313.03,2683.61 ; C1.1@1313.03,2683.61 1400.8,2703.49 C1.1@1313.03,2683.61
  BottomLayer w25: v1(165.52,2170.69) 165.52,2210.59 265.52,2210.59 ; R45.1@169.85,434.09 237.05,434.09 v1(210,434.09) ; R33.1@169.85,631.47 v1(203.94,631.47) Q1.3@238.04,631.47 ; U3.14@172.64,1049.61 v1(255.69,1049.61) 290,1083.92 290,1300.25 280.25,1310 ; v1(265.52,2170.69) 265.52,2210.59 ; v1(365.52,2170.69) 365.52,2210.59 ; v1(465.52,2170.69) 465.52,2210.59 ; v1(570.69,2170.69) 570.69,2210.59 ; 576.06,1972.55 543.67,1972.55 324.34,1972.55 280.25,1928.46 280.25,1310 ; 576.37,1972.55 688.47,1972.55 702.74,1986.81 702.74,2210.35 770.69,2210.35 ; v1(670.69,2170.69) 670.69,2210.59 ; v1(770.69,2170.69) 770.69,2210.35 ; v1(870.69,2170.69) 870.69,2210.59 ; v1(901.13,1638.18) 898.99,1636.03 898.99,1358.99 850,1310 542.38,1310 280.25,1310 ; v1(1050,2010) 1400,2010 1420,1990 1420,1900 1429.85,1890.15 P1.2@1493.33,1890.15 ; v1(1066.72,2210.35) 770.69,2210.35 ; 265.52,2210.59 365.52,2210.59 ; 365.52,2210.59 570.69,2210.59 ; 570.69,2210.59 670.69,2210.59 ; 670.69,2210.59 770.69,2210.59 770.69,2210.35
pads on no net: P1.3 P3.1 P3.2 P3.3 P3.4 P3.5 P3.6 P3.7 P3.8 P3.9 P3.10 U6.1 U6.2 U6.3 U6.14 U6.15 U6.16

## Polygon pours and split planes (outlines as drawn)
GND on BottomLayer "BottomLayer-No Net" (solid, remove dead copper, pour order 3): 10,3590 10,3678.58 cw(c110,3678.58) 39.29,3749.29 80,3790 230.71,3940.71 ccw(c160,4011.42) 260,4011.42 260,4018.58 cw(c360,4018.58) 289.29,4089.29 290,4090 290.71,4090.71 cw(c361.42,4020) 361.42,4120 410,4120 1368.58,4120 cw(c1368.58,4020) 1439.29,4090.71 1480,4050 cw(c1431.72,4001.72) 1500,4001.72 1500,3890 ccw(c1548.28,3890) 1514.14,3855.86 1580,3790 1720.71,3649.29 cw(c1650,3578.58) 1750,3578.58 1750,1680 1750,314.14 cw(c1715.86,314.14) 1740,290 cw(c1691.72,338.28) 1691.72,270 1429.24,270 1401.42,270 ccw(c1401.42,170) 1330.71,240.71 1320,230 ccw(c1368.28,181.72) 1300,181.72 1300,70 cw(c1250,70) 1250,20 1200,20 410,20 cw(c410,120) 310,120 310,160 ccw(c210,160) 210,260 190,260 110,260 cw(c110,360) 10,360 10,430
GND on TopLayer "BottomLayer-No Net" (solid, remove dead copper, pour order 4): 10,3590 10,3678.58 cw(c110,3678.58) 39.29,3749.29 80,3790 230.71,3940.71 ccw(c160,4011.42) 260,4011.42 260,4018.58 cw(c360,4018.58) 289.29,4089.29 290,4090 290.71,4090.71 cw(c361.42,4020) 361.42,4120 410,4120 1368.58,4120 cw(c1368.58,4020) 1439.29,4090.71 1480,4050 cw(c1431.72,4001.72) 1500,4001.72 1500,3890 ccw(c1548.28,3890) 1514.14,3855.86 1580,3790 1720.71,3649.29 cw(c1650,3578.58) 1750,3578.58 1750,1680 1750,314.14 cw(c1715.86,314.14) 1740,290 cw(c1691.72,338.28) 1691.72,270 1429.24,270 1401.42,270 ccw(c1401.42,170) 1330.71,240.71 1320,230 ccw(c1368.28,181.72) 1300,181.72 1300,70 cw(c1250,70) 1250,20 1200,20 410,20 cw(c410,120) 310,120 310,160 ccw(c210,160) 210,260 190,260 110,260 cw(c110,360) 10,360 10,430

## Keep-outs
KeepOutLayer:
  pour cut-out: 90,2913.89 cw(c121.97,2913.89) 121.97,2945.86 845.63,2945.86 cw(c845.63,2862.41) 929.09,2862.41 929.09,2565.39 cw(c890.69,2565.39) 890.69,2526.99 123.01,2526.99 cw(c123.01,2560) 90,2560
  pour cut-out: 90,2872.95 cw(c121.97,2872.95) 121.97,2904.92 845.63,2904.92 cw(c845.63,2821.46) 929.09,2821.46 929.09,2524.44 cw(c890.69,2524.44) 890.69,2486.04 123.01,2486.04 cw(c123.01,2519.06) 90,2519.06

## Silkscreen, mask and mechanical layers (free items; w line width, h text height)
TopOverlay:
  region: -34804.7,-41769.97
  region: -34804.7,-41769.97
  lines w15: 410,620 cw(c450,620) 450,660 770,660 cw(c770,610) 820,610 820,119.71 cw(c770,119.71) 770,69.71 450,69.71 cw(c450,109.71) 410,109.71 410,630 ; 410,711.81 ccw(c450,711.81) 450,671.81 770,671.81 ccw(c770,721.81) 820,721.81 820,1191.05 ccw(c770,1191.05) 770,1241.05 450,1241.05 ccw(c450,1201.05) 410,1201.05 410,711.81 ; 870,116.51 ccw(c920,116.51) 920,66.51 1236.23,66.51 ccw(c1236.23,116.51) 1286.23,116.51 1286.23,371.21 ccw(c1236.23,371.21) 1236.23,421.21 920,421.21 ccw(c920,371.21) 870,371.21 870,116.51 ; 870,480 ccw(c920,480) 920,430 1236.23,430 ccw(c1236.23,480) 1286.23,480 1286.23,1191.05 ccw(c1236.23,1191.05) 1236.23,1241.05 920,1241.05 ccw(c920,1191.05) 870,1191.05 870,480
  text "电源" at 926.64,2852.83 h100
  text "CL-DC-C01(V5.0)" at 1010.62,1400 h100
  text "485-ADDR" at 1370,1290 h100
  text "8" at 1310,1152 h100 r270
  text "DI" at 1030,1140 h100
  text "SYSTEM" at 480,1130 h100
  text "7" at 1310,1052 h100 r270
  text "RUN" at 437.13,1020 h100
  text "01" at 1120,1020 h100
  text "6" at 1310,952 h100 r270
  text "I1" at 467.13,906.97 h100
  text "02" at 1120,906.97 h100
  text "5" at 1310,852 h100 r270
  text "I2" at 467.13,793.95 h100
  text "03" at 1120,793.95 h100
  text "4" at 1310,752 h100 r270
  text "A1" at 467.13,680.92 h100
  text "04" at 1120,680.92 h100
  text "01" at 467.13,567.89 h100
  text "05" at 1120,567.89 h100
  text "3" at 1310,560 h100 r270
  text "2" at 1310,460 h100 r270
  text "02" at 467.13,454.86 h100
  text "06" at 1120,454.86 h100
  text "1" at 1310,360 h100 r270
  text "03" at 467.13,341.84 h100
  text "RX" at 1120,341.84 h100
  text "04" at 467.13,228.81 h100
  text "TX" at 1120,228.81 h100
  text "DO" at 449.19,110.51 h100
  text "485" at 1101.22,110.51 h100
Mechanical1:
  circle w10: c1673.23,4035.43 r78.74
  circle w10: c117.72,4035.43 r78.74
  circle w10: c1673.23,118.11 r78.74
  circle w10: c118.11,118.11 r78.74
  lines w11.81: 0,78.74 ccw(c78.74,78.74) 78.74,0 ; 0,4055.12 cw(c78.74,4055.12) 78.74,4133.86 ; 1692.91,0 ccw(c1692.91,78.74) 1771.65,78.74 ; 1692.91,4133.86 cw(c1692.91,4055.12) 1771.65,4055.12 ; 0,0 0,4133.86 1771.65,4133.86 1771.65,0 0,0
  text "PCB名称: CL-DC-C01(V5.0)" at 116.6,-229.68 h120
  text "尺寸： 10.5CM*4.5CM" at 116.72,-367.59 h120
  text "板材：  FR4" at 116.72,-506.52 h120
  text "板子层数：  2" at 116.72,-644.66 h120
  text "板子厚度：  1.6" at 116.72,-783.82 h120
  text "阻焊颜色：  蓝色" at 116.6,-922.07 h120
  text "铜箔厚度：  h/hoz" at 116.6,-1061.23 h120
  text "阻焊覆盖：  过孔盖油" at 116.6,-1200.05 h120
  text "字符颜色：  白色" at 116.72,-1338.18 h120
  text "焊盘喷镀：  有铅喷锡" at 116.72,-1477.23 h120
  text "字符颜色：  白色" at -3559.48,-2008.16 h23.62
  text "焊盘喷镀：  有铅喷锡" at -3559.48,-2147.21 h23.62
DrillDrawing:
  text ".legend" at 1823.11,1.6 h23.62

## Text inside footprints (layer, text, board x,y; h text height)
C2: TopOverlay "+" at 1248.52,2701.72 h23.62 r270
P1: BottomOverlay "re" at 1650.08,2077.97 h80 r270; BottomOverlay "mo" at 1650.08,1846.66 h80 r270; BottomOverlay "nc" at 1650.08,1970.8 h80 r270; BottomOverlay "ck" at 1650.08,2164.45 h80 r270; BottomOverlay "mi" at 1649.32,2258.45 h80 r270; BottomOverlay "-" at 1429.63,2341.57 h80 r90; BottomOverlay "+" at 1421.76,1869.13 h120 r90
P2: TopOverlay "26" at 1621.81,3546.82 h80; TopOverlay "13" at 1621.32,3432.27 h80; TopOverlay "14" at 214.16,3539.49 h80; TopOverlay "01" at 208.87,3432.68 h80